# Altium PCB PCB.PcbDoc
Units mm, origin at the board's own origin, x right, y up, seen from the top; angles counter-clockwise.
Board outline 28 x 31.14 mm, 2 copper layers (Top Layer, Bottom Layer); 15 components, 11 nets, 53 pads, 5 vias.
Unrouted connection lines stored in the file: 2.
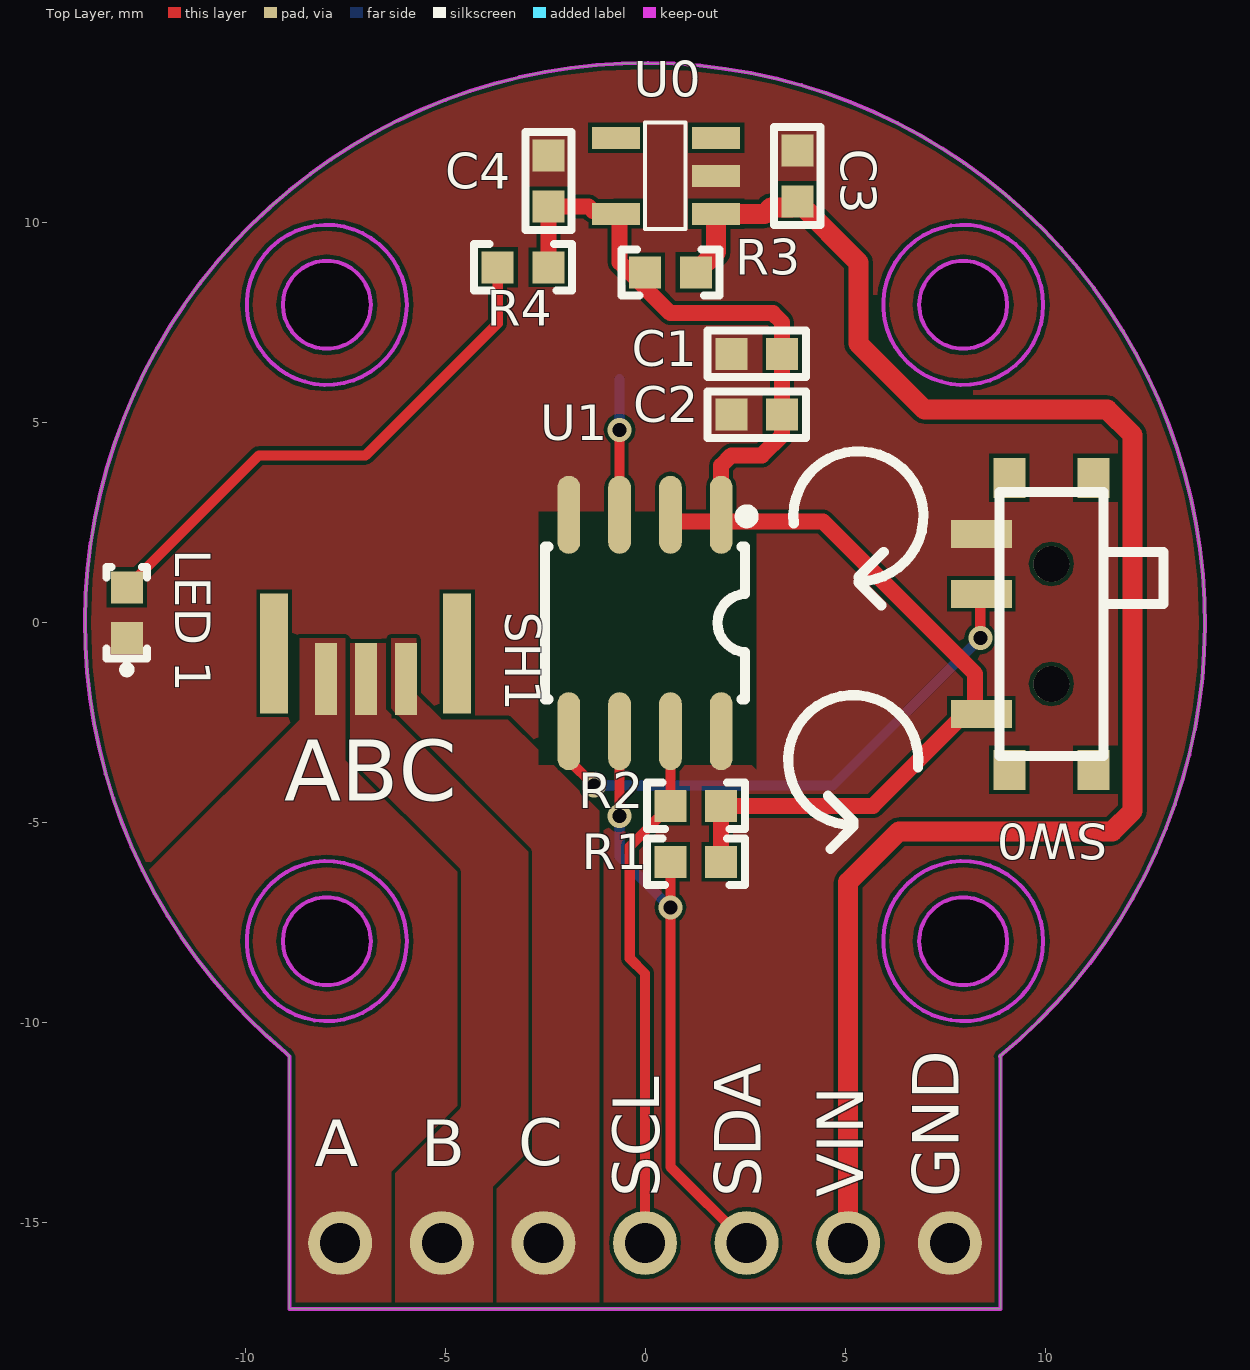
[diagram p0: Top Layer view]
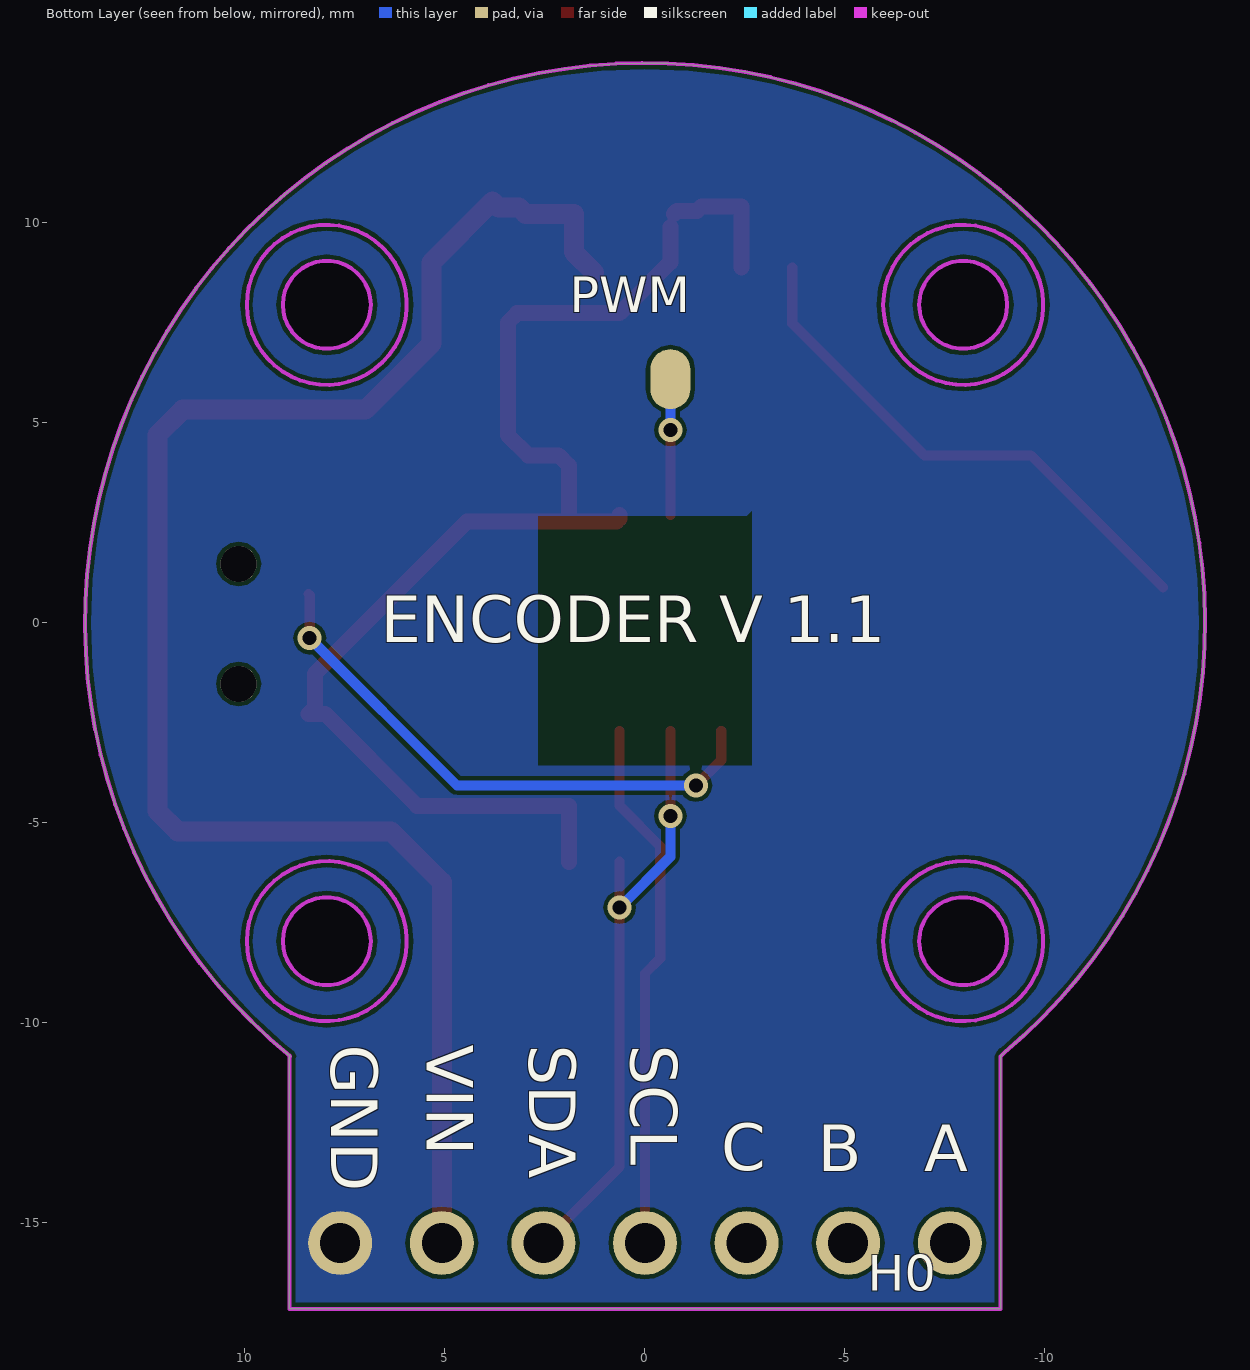
[diagram p1: Bottom Layer view, seen from below]

## Layer stack, top to bottom
Top Solder: solder mask 0.0102, Solder Resist, Dk 3.5
Top Layer: signal copper 0.0356
Dielectric 1: dielectric 0.32, FR-4, Dk 4.8
Bottom Layer: signal copper 0.0356
Bottom Solder: solder mask 0.0102, Solder Resist, Dk 3.5

## Board outline
-8.987,-10.735 cw(c0,0) 8.869,-10.832 8.89,-10.858 8.89,-17.145 -8.89,-17.145 -8.89,-10.832
cut-out: -9.055,-7.955 ccw(c-7.955,-7.955) -7.955,-9.055 ccw(c-7.955,-7.955) -6.855,-7.955 ccw(c-7.955,-7.955) -7.955,-6.855 ccw(c-7.955,-7.955)
cut-out: 6.855,-7.955 ccw(c7.955,-7.955) 7.955,-9.055 ccw(c7.955,-7.955) 9.055,-7.955 ccw(c7.955,-7.955) 7.955,-6.855 ccw(c7.955,-7.955)
cut-out: 6.855,7.955 ccw(c7.955,7.955) 7.955,6.855 ccw(c7.955,7.955) 9.055,7.955 ccw(c7.955,7.955) 7.955,9.055 ccw(c7.955,7.955)
cut-out: -7.955,6.855 cw(c-7.955,7.955) -9.055,7.955 cw(c-7.955,7.955) -7.955,9.055 cw(c-7.955,7.955) -6.855,7.955 cw(c-7.955,7.955)

## Design rules (kind name [scope] priority, off if disabled: settings)
Clearance [All] p1: gap=0.1 ignorepadtopadclearanceinfootprint=FALSE except(0: Arc-Hole Track-Hole SMDPad-Hole THPad-Hole Via-Hole Fill-Hole Poly-Hole Region-Hole Text-Hole; 0.102: Arc-Arc Arc-Track Arc-SMDPad Arc-THPad Track-Track Track-SMDPad Track-THPad SMDPad-SMDPad SMDPad-THPad THPad-THPad; 0.127: Arc-Via Track-Via SMDPad-Via SMDPad-Text THPad-Via Via-Via; 0.254: Arc-Text Track-Text THPad-Text Via-Text Fill-Text Poly-Text Region-Text Text-Text)
HoleSize [All] p1: absolutevalues=TRUE maxlimit=30 minlimit=0.025 maxpercent=80.000 minpercent=20.000
HoleToHoleClearance [All] p1: gap=0.152 allowstackedmicrovias=TRUE
MinimumSolderMaskSliver [All] p1: minsoldermaskwidth=0
PlaneClearance [All] p1: clearance=0.254
PlaneConnect [All] p1: planeconnectstyle=Direct reliefexpansion=0.508 reliefentries=4 reliefconductorwidth=0.254 reliefairgap=0.254
PolygonConnect [All] p1: connectstyle=Direct reliefconductorwidth=0.254 reliefentries=4 polygonreliefangle="90 Angle" airgapwidth=0.254
RoutingVias [All] p1: holewidth=0.711 width=1.27 viastyle="Through Hole" minholewidth=0.3 minwidth=0.5 maxholewidth=30 maxwidth=30
SilkToSilkClearance [All] p1: silktosilkclearance=0
SilkToSolderMaskClearance [IsPad] p1: minsilkscreentomaskgap=0 clearancetoexposedcopper=TRUE
SolderMaskExpansion [All] p1: expansion=0.102 istentingtop=FALSE
Width [All] p1: maxlimit=1.5 minlimit=0.254 preferedwidth=0.254
23 further rules are at their usual default settings.

## Components (designator, comment, footprint, x,y, rotation, side; value= is the part's Value field where it differs from the comment)
C1 "1UF" CC1608-0603 2.794,6.731 r0 top
C2 "100nF" CC1608-0603 2.794,5.207 r0 top
C3 "1UF" CC1608-0603 3.81,11.176 r270 top
C4 "2.2uF" CC1608-0603 -2.413,11.049 r270 top
H0 "Header_7P_Curved" Header_2_54_7PW 7.62,-15.5 r180 bottom locked
"LED 1" "LED 0603" "LED 0603" -12.954,0.254 r270 top
PWM "Test" TEST2 -0.635,6.096 r270 bottom
R1 "4.7K" CR1608-0603 1.27,-4.572 r0 top
R2 "4.7K" CR1608-0603 1.27,-5.969 r0 top
R3 "0R/NC" CR1608-0603 0.635,8.763 r0 top
R4 "2K" CR1608-0603 -3.048,8.89 r0 top
SH1 "SH1.0-3P" SH1.0-3P -5.969,-1.397 r180 top
SW0 "MKS-02" MSK-02 10.16,-1.524 r90 top
U0 "TPS70933DBVR" SOT23-5 1.778,12.131 r270 top
U1 "AS5600-ASOM" SOIC-8 0,0 r180 top

## Footprints (in the part's own frame and the unit in brackets; to place one, negate y for a bottom-side part, rotate by r counter-clockwise, add the part's x,y. Pads: shape width x height; smd on the part's side, far side on the other; paste and mask are expansions set on the pad)
CC1608-0603 [mm]
  rect 0.8x0.8 smd: 1(-0.635,0) 2(0.635,0)
  silkscreen extent -1.23,-0.58 1.23,0.58, body extent -0.8,-0.4 0.8,0.4, height 0.3
CR1608-0603 [mm]
  rect 0.8x0.8 smd: 1(-0.635,0) 2(0.635,0)
  silkscreen extent -1.23,-0.58 1.23,0.58, body extent -0.8,-0.4 0.8,0.4, height 0.45
Header_2_54_7PW [mm] "6P弯针"
  round 1.6 hole 1: 1(0,0) 2(2.54,0) 3(5.08,0) 4(7.62,0) 5(10.16,0) 6(12.7,0) 7(15.24,0)
  body extent -1.27,-10.07 16.51,0.25, height 2.75
"LED 0603" [mm]
  rect 0.8x0.8 smd: 1(-0.635,0) 2(0.635,0)
  silkscreen extent -1.14,-0.51 1.48,0.51, body extent -0.8,-0.4 0.8,0.4, height 0.6
MSK-02 [mm] "拨动开关"
  rect 1x0.8 smd: 0(-2.15,-1.05) 0(-2.15,1.05) 0(5.15,-1.05) 0(5.15,1.05)
  rect 0.7x1.524 smd: 1(-0.75,1.75) 2(2.25,1.75) 3(3.75,1.75)
  round 0.9 hole 0.9 unplated: ""(0,0) ""(3,0)
  silkscreen extent -1.8,-2.8 4.8,1.3, body extent -2.6,-2.79 5.59,2.22, height 1.6
SH1.0-3P [mm]
  rect 0.7x3 smd: 0(-1.27,-0.635) 0(3.3,-0.635)
  rect 0.55x1.8 smd: 1(0,0) 2(1,0) 3(2,0)
  body extent -1.49,-2.29 3.56,0.55, height 3
SOIC-8 [mil]
  oval 22.38x76.78 smd paste+0 mask+2: 1(-75,-106.5) 2(-25,-106.5) 3(25,-106.5) 4(75,-106.5) 5(75,106.5) 6(25,106.5) 7(-25,106.5) 8(-75,106.5)
  silkscreen extent -106,-111 98,75, body extent -98,-125 98,120, height 69
SOT23-5 [mm] "适用于MIC5205"
  rect 0.55x1.2 smd: 1(1.905,0) 2(0.955,0) 3(0.005,0) 4(0.005,-2.5) 5(1.905,-2.5)
  silkscreen extent -0.38,-1.78 2.29,-0.76, body extent -0.6,-2.82 2.5,0.38, height 1.45
TEST2 [mm] "测试焊接点"
  oval 1.5x1 smd: 1(0,0)

## Part data
C1 C2 C3 C4: library part "Cap Chip 0603", "0603封装的电容", Published=8-Jun-2000, Publisher="Altium Limited", Revision="July-2002: Re-released for DXP Platform."
H0: "弯的6P排针"
PWM: "测试焊接点"
R1 R2 R3 R4: library part "Resistor Chip 0603", "0603封装电阻", Published=8-Jun-2000, Publisher="Altium Limited", Revision="July-2002: Re-released for DXP Platform."
SH1: "间距为1mm的端子"
SW0: library part sw-MSK-02, "微型拨动开关"
U0: "LDO 3.3V 150mA低压差线性稳压器芯片 超低IQ 输入2.7~30V"
U1: BOM_LCSC Assembly=Yes, BOM_Manufacturer=Ams, BOM_Manufacturer Part=AS5600-ASOM, BOM_Supplier=LCSC, BOM_Supplier Part=C79815, SMT Type=Extend, spicePre=U, spiceSymbolName=AS5600-ASOM

## Via types
v1: diameter 0.6, hole 0.35, Top Layer to Bottom Layer, tented both sides, 5 vias

## Nets (pads, with @x,y where several pads share a name; then routed paths per layer and width w, separated by ;. In a path a pad name is that pad's centre, name@x,y a point inside that pad or via, vN(x,y) a via of type N, cw(c..) or ccw(c..) an arc to the next point about the centre after c; other vN are vias at no path point)
3V3: C1.2 C2.2 C4.2 R1.2 R2.2 R3.1 R4.2 SW0.1 U0.5 U1.1 U1.2 | length 34
  Top Layer w0.4: R4.2 C4.2 -1.413,10.414 -1.3,10.301 -0.797,10.301 U0.5 ; -0.635,9.906 -0.635,9.017 0.635,7.747 3.195,7.747 3.429,7.513 C1.2 C2.2 3.429,4.699 2.921,4.191 2.159,4.191 1.905,3.937 U1.1 ; U1.2 0.635,2.618 0.713,2.54 4.445,2.54 8.255,-1.27 8.255,-2.124 SW0.1@8.405,-2.274 ; R2.2 R1.2 5.7,-4.572 7.998,-2.274 SW0.1@8.405,-2.274 ; SW0.1 SW0.1@8.405,-2.274
GND: "LED 1.2" C1.1 C2.1 C3.1 C4.1 H0.1 SW0.3 U0.2 U1.4 U1.8
"NetLED 1_1": "LED 1.1" R4.1 | length 13.4
  Top Layer w0.254: -12.954,0.889 -9.652,4.191 -6.985,4.191 -3.683,7.493 R4.1
NetPWM_1: PWM.1 U1.3 | length 3.4
  Top Layer w0.254: U1.3 v1(-0.635,4.826)
  Bottom Layer w0.254: v1(-0.635,4.826) PWM.1
OUT1: H0.7 SH1.3
OUT2: H0.6 SH1.2
OUT3: H0.5 SH1.1
PGO: SW0.2 U1.5 | length 13.9
  Top Layer w0.254: U1.5 -1.905,-3.429 v1(-1.27,-4.064) ; v1(8.382,-0.381) 8.382,0.698 SW0.2
  Bottom Layer w0.254: v1(-1.27,-4.064) 4.699,-4.064 v1(8.382,-0.381)
SCL: H0.4 R1.1 U1.7 | length 13.4
  Top Layer w0.254: H0.4 0,-8.763 -0.381,-8.382 -0.381,-5.588 R1.1 U1.7
SDA: H0.3 R2.1 U1.6 | length 15.3
  Top Layer w0.254: v1(-0.635,-4.826) U1.6 ; R2.1 v1(0.635,-7.112) 0.635,-13.595 H0.3
  Bottom Layer w0.254: v1(-0.635,-4.826) -0.635,-5.842 v1(0.635,-7.112)
Vin: C3.2 H0.2 R3.2 U0.1 | length 42.1
  Top Layer w0.5: R3.2 1.778,9.271 U0.1 2.987,10.226 3.152,10.391 3.66,10.391 C3.2 5.334,9.017 5.334,6.985 6.985,5.334 11.557,5.334 12.192,4.699 12.192,-4.699 11.684,-5.207 6.35,-5.207 5.08,-6.477 H0.2
pads on no net: SH1.0 SW0. SW0.0 U0.3 U0.4

## Polygon pours and split planes (outlines as drawn)
GND on Top Layer "GND_L01_P004" (solid, pour order 4): -8.987,-10.735 cw(c0,0) 8.869,-10.832 8.89,-10.858 8.89,-17.145 -8.89,-17.145 -8.89,-10.832
OUT3 on Top Layer "NONET_L-01_P-001" (solid, pour order 2): -6.35,-0.381 -5.715,-0.381 -5.715,-1.778 -5.08,-2.413 -3.429,-2.413 -1.143,-4.699 -1.143,-17.145 -3.81,-17.145 -3.81,-14.097 -2.921,-13.208 -2.921,-5.715 -6.35,-2.286
OUT2 on Top Layer "NONET_L-01_P-001" (solid, pour order 1): -7.366,-0.508 -6.477,-0.508 -6.477,-2.159 -2.921,-5.715 -2.921,-13.208 -3.81,-14.097 -3.81,-17.145 -6.223,-17.145 -6.35,-17.018 -6.35,-13.716 -4.699,-12.065 -4.699,-6.223 -7.366,-3.556
OUT1 on Top Layer "NONET_L-01_P-001" (solid, remove dead copper, pour order 0): -7.493,-0.381 -7.493,-3.429 -4.699,-6.223 -4.699,-12.065 -6.35,-13.716 -6.35,-17.018 -8.89,-17.018 -8.89,-10.795 -9.144,-10.795 -12.573,-7.366 -12.573,-6.35 -8.636,-2.413 -8.636,-0.381
GND on Bottom Layer "GND_L02_P003" (solid, pour order 3): -8.987,-10.735 cw(c0,0) 8.869,-10.832 8.89,-10.858 8.89,-17.145 -8.89,-17.145 -8.89,-10.832

## Keep-outs
Keep-Out Layer:
  circle w0.1: c-7.955,7.955 r2
  circle w0.1: c7.955,7.955 r2
  circle w0.1: c-7.955,-7.955 r2
  circle w0.1: c7.955,-7.955 r2
  circle w0.1: c7.955,7.955 r1.1
  circle w0.1: c7.955,-7.955 r1.1
  circle w0.1: c-7.955,-7.955 r1.1
  circle w0.1: c-7.955,7.955 r1.1
  lines w0.1: 8.869,-10.832 ccw(c0,0) -8.987,-10.735 -8.89,-10.832 -8.89,-17.145 8.89,-17.145 8.89,-10.858

## Other copper
Top Layer:
  pour cut-out: -2.667,2.794 2.794,2.794 2.794,-3.683 2.667,-3.556 -2.667,-3.556
Bottom Layer:
  pour cut-out: -2.667,2.794 -2.54,2.667 2.667,2.667 2.667,-3.556 -2.667,-3.556

## Silkscreen, mask and mechanical layers (free items; w line width, h text height)
Top Overlay:
  lines w0.254: 3.718,2.487 cw(c5.334,2.667) 5.334,1.041 ; 4.572,-4.318 5.207,-4.953 5.207,-5.055 ; 4.635,-5.651 5.207,-5.08 ; 5.207,-5.068 5.207,-5.08 ; 5.334,1.016 5.905,0.445 ; 5.334,1.143 5.969,1.778 ; 6.823,-3.609 ccw(c5.207,-3.429) 5.207,-5.055 ; 5.207,-5.08 5.207,-5.055
  text "ABC" at -9.017,-4.445 h1.52
  text "C" at -3.175,-13.948 h2
  text "A" at -8.255,-13.97 h2
  text "B" at -5.588,-13.97 h2
  text "SCL" at 0.738,-14.351 h2 r90
  text "SDA" at 3.278,-14.351 h2 r90
  text "VIN" at 5.842,-14.351 h2 r90
  text "GND" at 8.231,-14.351 h2 r90
Bottom Overlay:
  text "ENCODER V 1.1" at 6.604,-0.865 h2
  text "SCL" at 0.738,-10.541 h2 r90
  text "SDA" at 3.278,-10.541 h2 r90
  text "VIN" at 5.842,-10.541 h2 r90
  text "GND" at 8.231,-10.541 h2 r90
  text "C" at -1.905,-14.075 h2
  text "A" at -6.985,-14.097 h2
  text "B" at -4.318,-14.097 h2
Top Solder:
  circle w0.9: c7.955,-7.955 r1.5
  circle w0.9: c-7.955,-7.955 r1.5
  circle w0.9: c7.955,7.955 r1.5
  circle w0.9: c-7.955,7.955 r1.5
Bottom Solder:
  circle w0.9: c7.955,-7.955 r1.5
  circle w0.9: c-7.955,-7.955 r1.5
  circle w0.9: c7.955,7.955 r1.5
  circle w0.9: c-7.955,7.955 r1.5